# Altium PCB USB HUB 2.0.PcbDoc
Units mil, origin at the board's own origin, x right, y up, seen from the top; angles counter-clockwise.
Board outline 2250 x 2500 mil, 2 copper layers (Top Layer, Bottom Layer); 52 components, 33 nets, 185 pads, 235 vias.
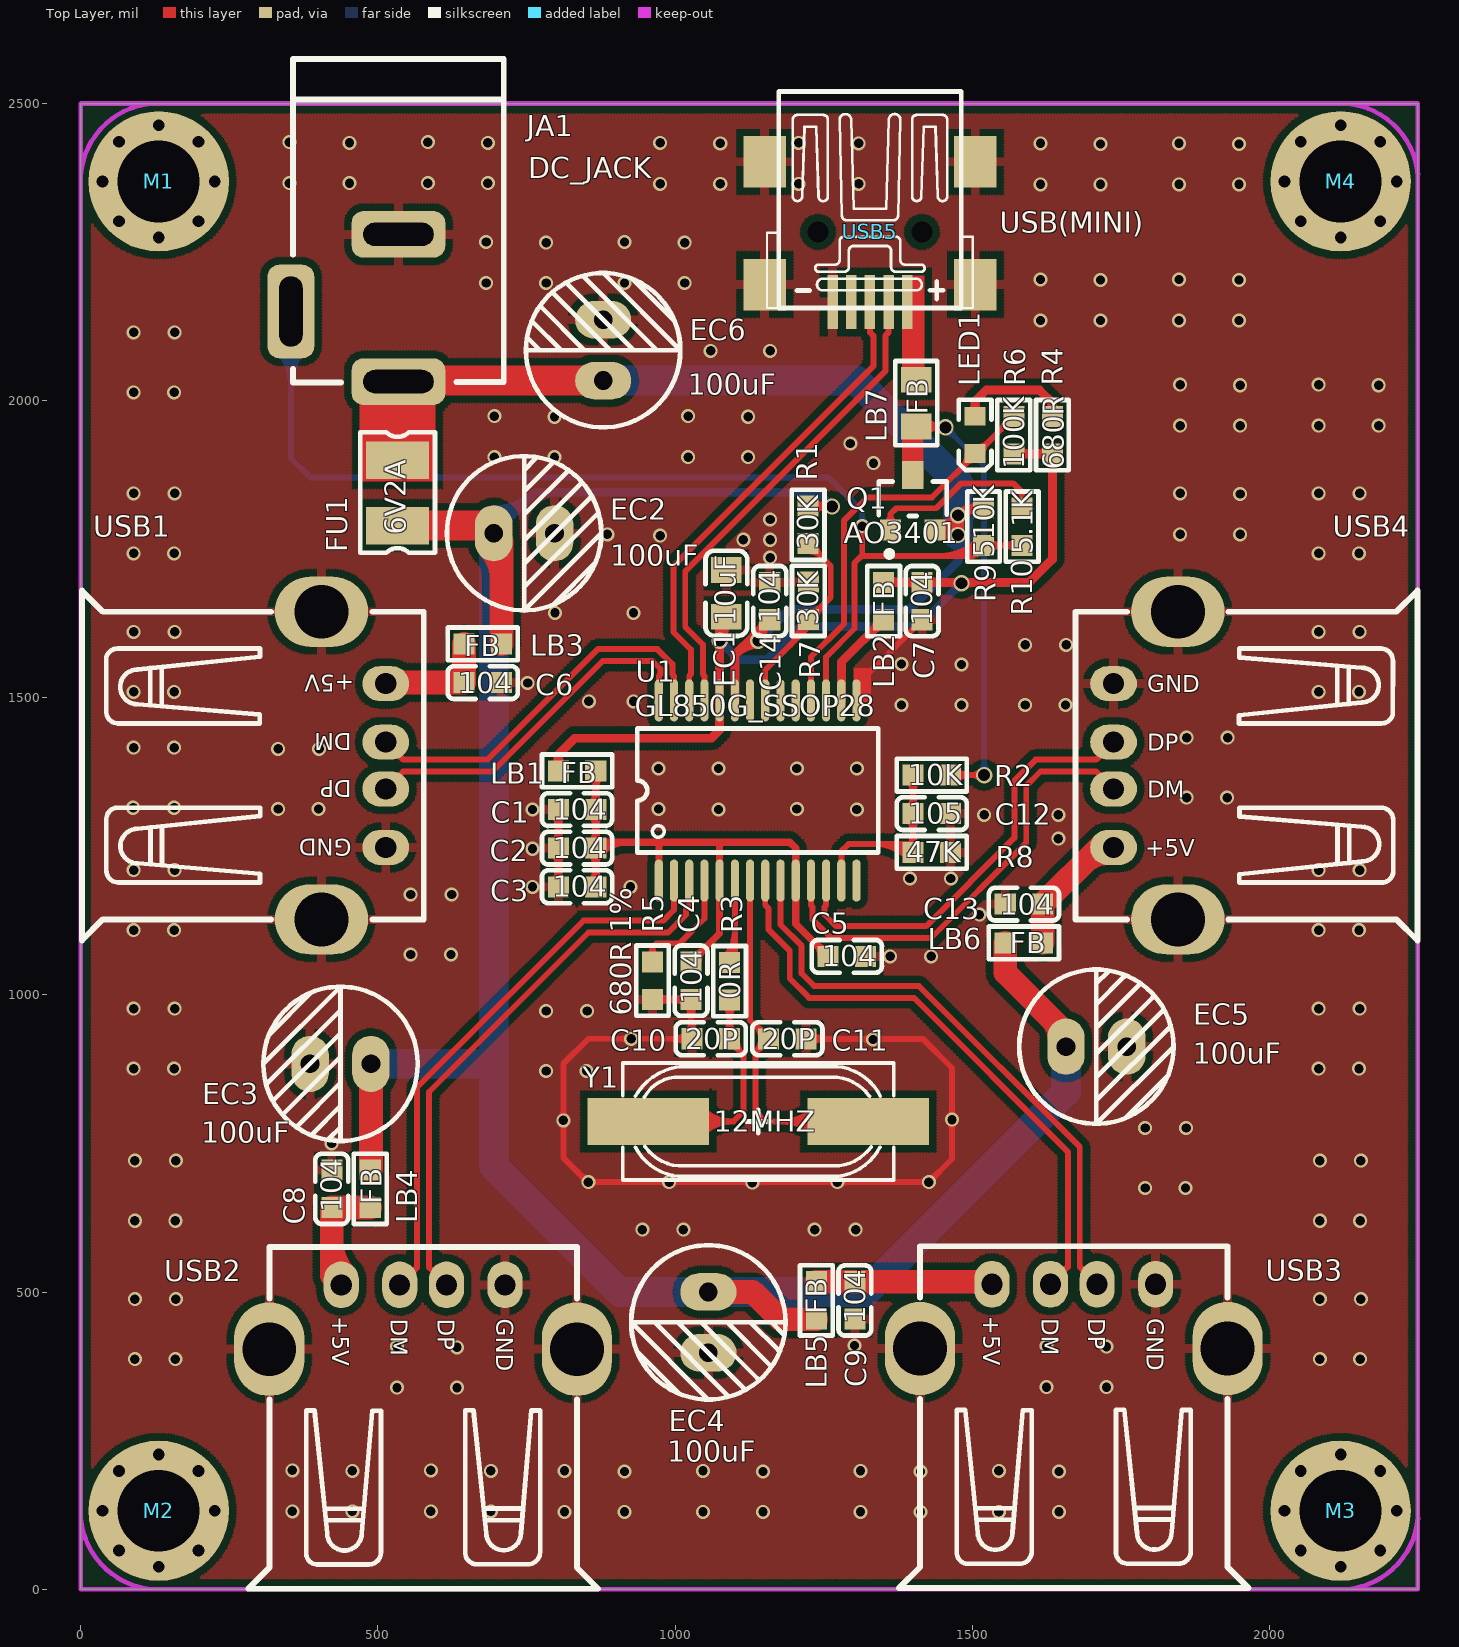
[diagram p0: Top Layer view]
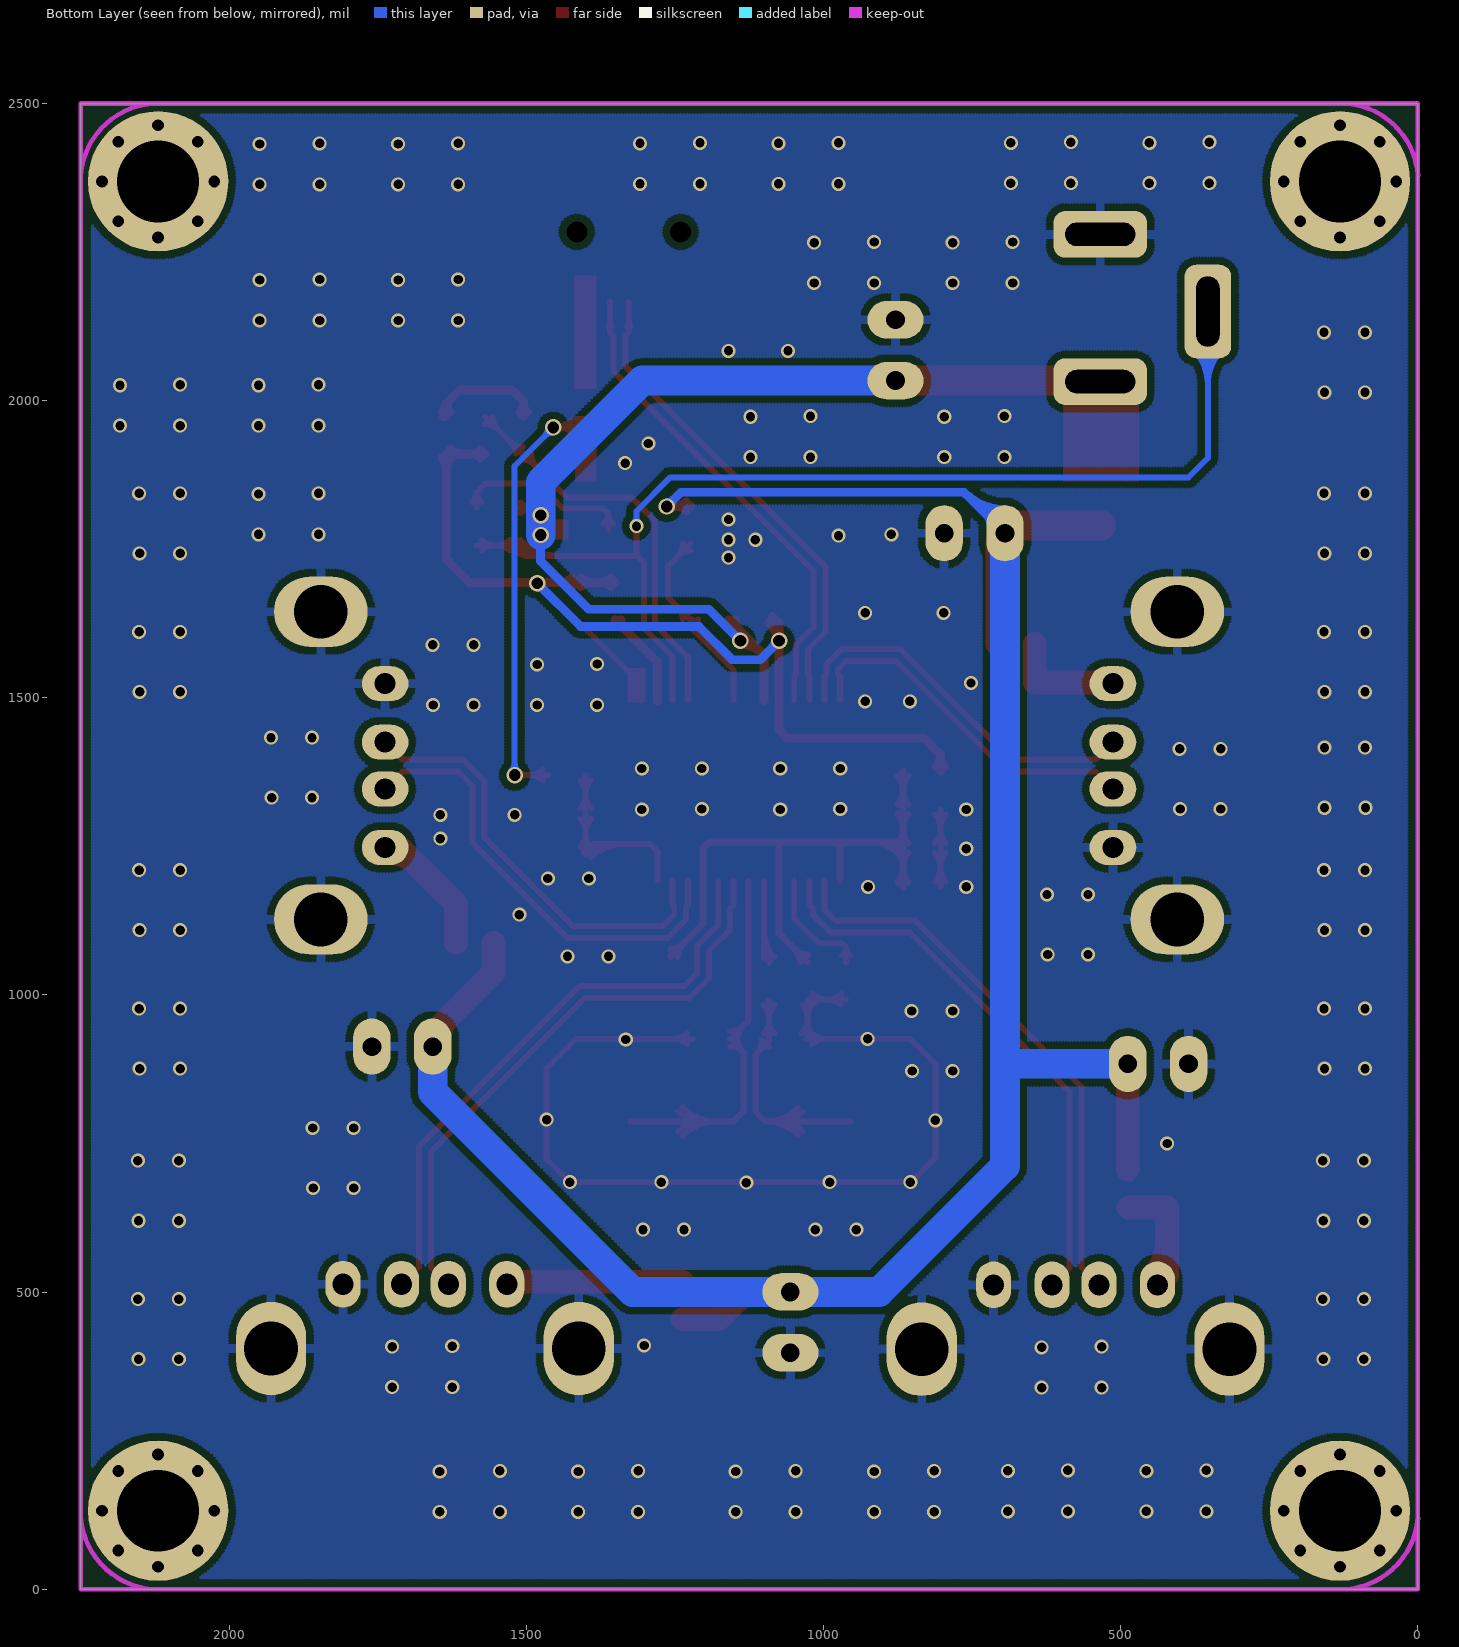
[diagram p1: Bottom Layer view, seen from below]
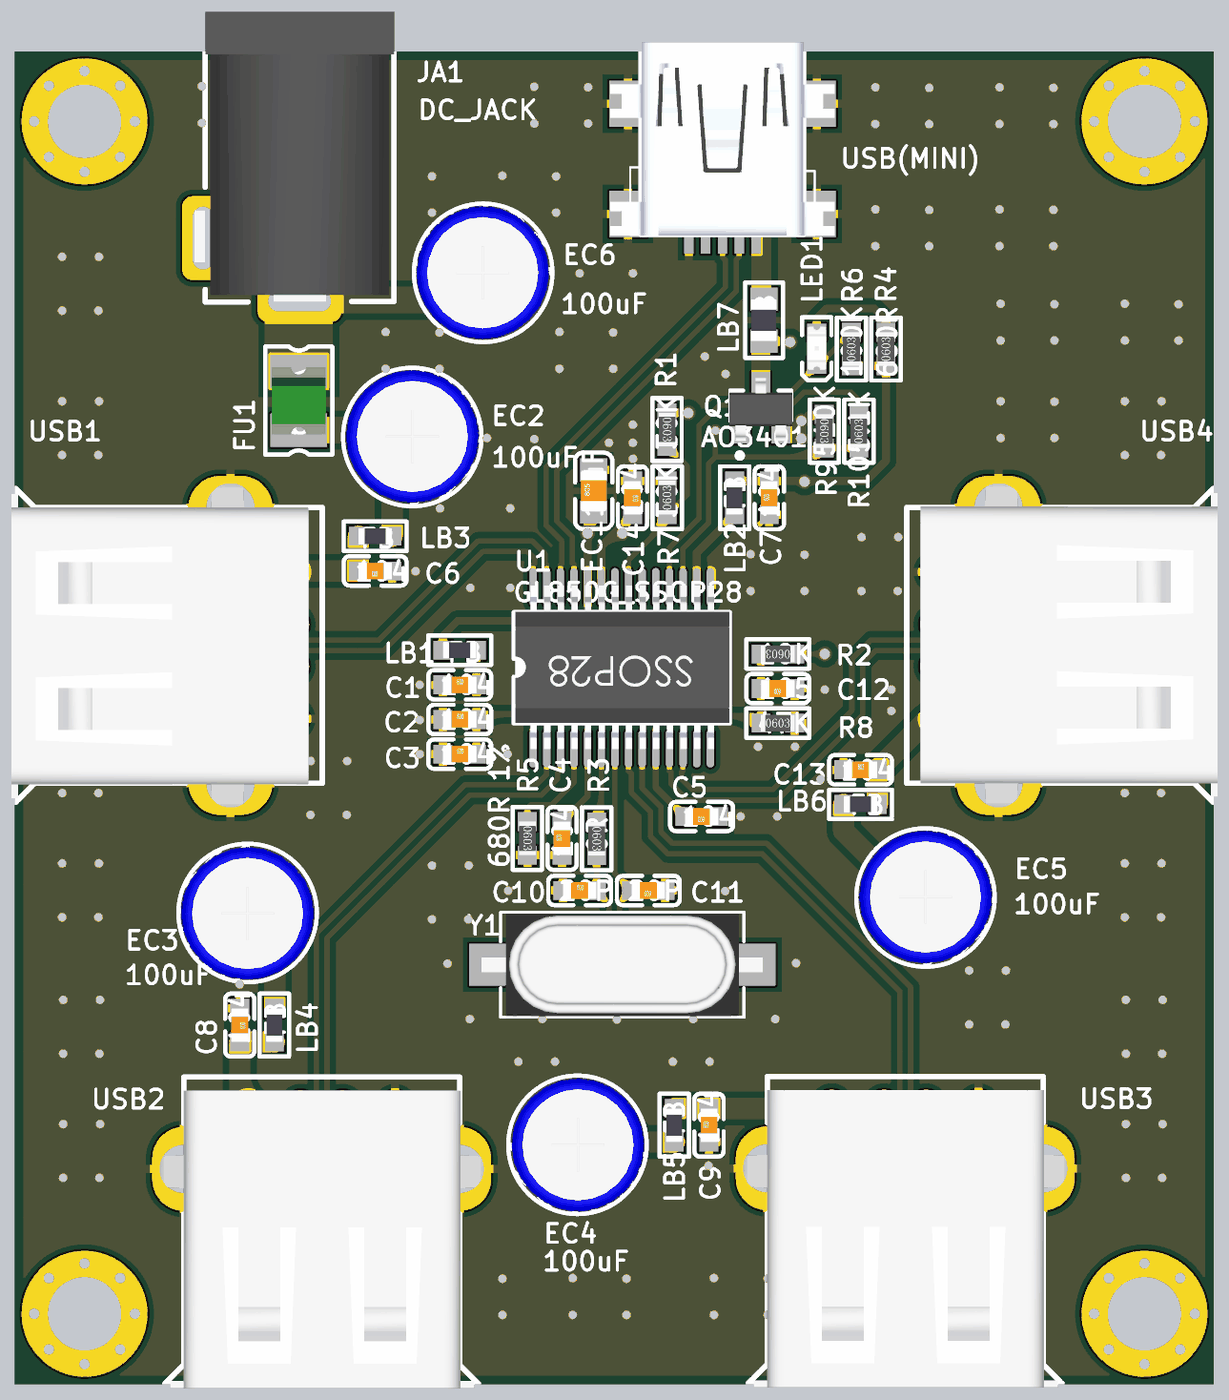
[diagram p2: 3D render of the assembled board from above, using the file's embedded part models]

## Layer stack, top to bottom
Top Layer: signal copper 1.4
Dielectric: dielectric 12.6, FR-4, Dk 4.8
Bottom Layer: signal copper 1.4

## Board outline
0,0 0,2500 2250,2500 2250,0

## Design rules (kind name [scope] priority, off if disabled: settings)
Clearance Polygon [InPolygon] p1: gap=12
Clearance [All] p2: gap=8
ComponentClearance [All] p1 off: gap=1 collisioncheckmode=3 verticalgap=1 showdistances=FALSE
DiffPairsRouting DiffPair_DiffPairsRouting [InDifferentialPairClass('DM_DP Class')] p1: maxlimit=10 minlimit=8 mostfreqgap=10 maxuncoupledlength=500
DiffPairsRouting [All] p2: maxlimit=10 minlimit=10 mostfreqgap=10 maxuncoupledlength=500
HoleSize [All] p1: absolutevalues=TRUE maxlimit=300 minlimit=1 maxpercent=80.000 minpercent=20.000
HoleToHoleClearance [All] p1: gap=1 allowstackedmicrovias=TRUE
MatchedLengths DiffPair_MatchedLengths [InComponentClass('DM_DP Class')] p1: tolerance=1000 checknetsindiffpair=TRUE checkdiffpairvsdiffpair=TRUE checkothers=TRUE
MinimumSolderMaskSliver [All] p1 off: minsoldermaskwidth=1
PolygonConnect GND_VIA [IsVia] p1: connectstyle=Direct reliefconductorwidth=10 reliefentries=4 polygonreliefangle="90 Angle"
PolygonConnect [All] p2: connectstyle=Relief reliefconductorwidth=15 reliefentries=4 polygonreliefangle="90 Angle"
RoutingVias [All] p1: holewidth=28 width=50 viastyle="Through Hole" minholewidth=5 minwidth=5 maxholewidth=100 maxwidth=100
ShortCircuit M_KONG_1 [InComponent(M1) OR  InComponent(M2) OR  InComponent(M3) OR InComponent(M4)] p1: allowed=TRUE
ShortCircuit [All] p2: allowed=FALSE
SilkToSilkClearance [All] p1 off: silktosilkclearance=0
SilkscreenOverComponentPads [All] p1 off: minsilkscreentomaskgap=0
SolderMaskExpansion [All] p1: expansion=4
Width DiffPair_Width [All] p1: maxlimit=50 minlimit=5 preferedwidth=10 minimp=50.000000 maximp=50.000000 favimp=50.000000
Width [All] p2: maxlimit=50 minlimit=5 preferedwidth=10 minimp=50.000000 maximp=50.000000 favimp=50.000000
20 further rules are at their usual default settings.

## Classes and differential pairs
differential pair D_D4: +DM4 -DP4
differential pair D_D3: +DM3 -DP3
differential pair D_D2: +DM2 -DP2
differential pair D_D1: +DM1 -DP1
differential pair D_D0: +DM0 -DP0

## Components (designator, comment, footprint, x,y, rotation, side; value= is the part's Value field where it differs from the comment)
C1 "104" C0603 835,1312 r0 top
C2 "104" C0603 835,1247 r0 top
C3 "104" C0603 835,1182 r0 top
C4 "104" C0603 1027,1024 r90 top
C5 "104" C0603 1289,1065 r180 top
C6 "104" C0603 676.4,1525.7 r180 top
C7 "104" C0603 1415.9,1662.9 r90 top
C8 "104" C0603 422.3,673.6 r270 top
C9 "104" C0603 1302.7,485.8 r90 top
C10 "20P" C0603 1060.1,926.3 r0 top
C11 "20P" C0603 1188.9,926.2 r180 top
C12 "105" C0603 1432,1305 r180 top
C13 "104" C0603 1587.1,1152.7 r0 top
C14 "104" C0603 1159.3,1662.9 r270 top
EC1 "10uF" C0805 1086.3,1675.9 r90 top
EC2 "100uF" RB-.2.5/.6.3MM 746,1777 r0 top
EC3 "100uF" RB-.2.5/.6.3MM 437,884 r180 top
EC4 "100uF" RB-.2.5/.6.3MM 1056,449 r270 top
EC5 "100uF" RB-.2.5/.6.3MM 1709,913 r0 top
EC6 "100uF" RB-.2.5/.6.3MM 879,2085 r90 top
FU1 "6V2A" FU1210 533,1845 r90 top
JA1 "DC_JACK" DC-005 444,2156 r180 top
LB1 "FB" FB0603 835,1377 r0 top
LB2 "FB" FB0603 1350.9,1662.9 r90 top
LB3 "FB" FB0603 676.36,1590.74 r180 top
LB4 "FB" FB0603 487,673.56 r270 top
LB5 "FB" FB0603 1237.66,485.8 r90 top
LB6 "FB" FB0603 1587.1,1087.66 r0 top
LB7 "FB" FB0805 1406,1996 r90 top
LED1 "PWR_LED" LED-0603 1505,1974 r270 top
M1 "M_KONG" M3*8 131,2369 r0 top
M2 "M_KONG" M3*8 131,132 r0 top
M3 "M_KONG" M3*8 2120,132 r0 top
M4 "M_KONG" M3*8 2120,2369 r0 top
Q1 "AO3401" SOT23 1399.9,1828.7 r0 top
R1 "30K" R0603 1224,1791 r270 top
R2 "10K" R0603 1431.96,1370 r180 top
R3 "0R" R0603 1091.9,1023.2 r270 top
R4 "680R" R0603 1635,1942 r90 top
R5 "680R 1%" R0603 962,1024 r270 top
R6 "100K" R0603 1570,1942 r90 top
R7 "30K" R0603 1224.34,1663.12 r90 top
R8 "47K" R0603 1432,1240 r0 top
R9 "510K" R0603 1519,1788 r270 top
R10 "5.1K" R0603 1584,1788 r90 top
U1 "GL850G_SSOP28" SSOP28 1139,1344 r90 top
USB1 "USB_A(B)" USB-A 459,1386 r180 top
USB2 "USB_A(B)" USB-A 576,458 r270 top
USB3 "USB_A(B)" USB-A 1671,459 r270 top
USB4 "USB_A(B)" USB-A 1792,1386 r0 top
USB5 "USB(MINI)" USB-MINI-SMT 1328,2284 r180 top
Y1 "12MHZ" HC-49S_SMD 1140,787 r0 top

## Footprints (in the part's own frame and the unit in brackets; to place one, negate y for a bottom-side part, rotate by r counter-clockwise, add the part's x,y. Pads: shape width x height; smd on the part's side, far side on the other; paste and mask are expansions set on the pad)
C0603 [mm]
  rect 0.9x0.9 smd: 1(-0.8,0) 2(0.8,0)
  silkscreen extent -1.5,-0.7 1.5,0.7, body extent -0.8,-0.4 0.8,0.4, height 0.3
C0805 [mm]
  rect 1.1x1.3 smd: 1(-1,0) 2(1,0)
  silkscreen extent -1.83,-0.89 1.83,0.89, body extent -1,-0.63 1,0.63, height 0.77
DC-005 [mm]
  rrect50% 4x2 hole 1 slot 3 at 0 deg: 1(-2.3,3.15) 2(-2.3,-3.15)
  rrect50% 2x4 hole 1 slot 3 at 90 deg: 3(2.3,0.15)
  silkscreen extent -6.8,-10.65 2.2,3.19, body extent -6.8,-10.63 2.7,3.19, height 11.02
FB0603 [mm]
  rect 0.9x0.9 smd: 1(-0.8,0) 2(0.8,0)
  silkscreen extent -1.5,-0.7 1.5,0.7, body extent -0.8,-0.39 0.8,0.41, height 0.8
FB0805 [mm]
  rect 1.1x1.3 smd: 1(-1,0) 2(1,0)
  silkscreen extent -1.8,-0.9 1.8,0.9, body extent -1,-0.62 1,0.64, height 0.85
FU1210 [mm]
  rect 1.6x2.7 smd: 1(-1.4,0) 2(1.4,0)
  silkscreen extent -2.57,-1.6 2.59,1.6, body extent -1.61,-1.28 1.61,1.3, height 0.67
HC-49S_SMD [mm]
  rect 5.2x2 smd: 1(-4.7,0) 2(4.7,0)
  silkscreen extent -5.8,-2.5 5.8,2.5, body extent -6.7,-2.46 6.7,2.44, height 4
LED-0603 [mm]
  rect 0.8x0.9 smd: 1(0,0) 2(1.6,0)
  silkscreen extent -0.7,-0.7 2.3,0.7, body extent -0.26,-0.45 1.81,0.46, height 0.85
M3*8 [mm] "M3螺丝孔"
  round 0.5 hole 0.5: 1(-2.4,0) 1(-1.7,-1.7) 1(-1.7,1.7) 1(0,-2.4) 1(0,2.4) 1(1.7,-1.7) 1(1.7,1.7) 1(2.4,0)
  round 6 hole 3.5: 1(0,0)
R0603 [mm]
  rect 0.9x0.9 smd: 1(-0.8,0) 2(0.8,0)
  silkscreen extent -1.5,-0.7 1.5,0.7, body extent -0.8,-0.4 0.8,0.4, height 0.45
RB-.2.5/.6.3MM [mm] "电解电容"
  oval 1.6x2.4 hole 0.8: 1(-1.3,0) 2(1.3,0)
  silkscreen extent -3.3,-3.3 3.3,3.3, body extent -3.18,-3.15 3.18,3.2, height 11.53
SOT23 [mm]
  rect 0.91x0.91 smd: 1(-0.95,-1.175) 2(0.95,-1.175)
  rect 0.91x1.2 smd: 3(0,1.175)
  silkscreen extent -1.45,-2.32 1.45,0.9, body extent -1.5,-1.5 1.5,1.5, height 1
SSOP28 [mm]
  oval 1.8x0.35 smd: 1(-3.85,4.225) 2(-3.85,3.575) 3(-3.85,2.925) 4(-3.85,2.275) 5(-3.85,1.625) 6(-3.85,0.975) 7(-3.85,0.325) 8(-3.85,-0.325) 9(-3.85,-0.975) 10(-3.85,-1.625) 11(-3.85,-2.275) 12(-3.85,-2.925) 13(-3.85,-3.575) 14(-3.85,-4.225) 15(3.85,-4.225) 16(3.85,-3.575) 17(3.85,-2.925) 18(3.85,-2.275) 19(3.85,-1.625) 20(3.85,-0.975) 21(3.85,-0.325) 22(3.85,0.325) 23(3.85,0.975) 24(3.85,1.625) 25(3.85,2.275) 26(3.85,2.925) 27(3.85,3.575) 28(3.85,4.225)
  silkscreen extent -2.65,-5.15 2.65,5.15, body extent -3.88,-5.12 3.92,5.08, height 1.75
USB-A [mm]
  oval 2x1.5 hole 0.9: 1(-1.375,-3.5) 2(-1.375,-1) 3(-1.375,1) 4(-1.375,3.5)
  oval 4x3 hole 2.3: 5(1.375,-6.575) 6(1.375,6.575)
  silkscreen extent -3,-7.48 11.62,7.48, body extent -2.35,-7.87 11.81,7.92, height 7.55
USB-MINI-SMT [mm]
  rect 0.45x2.3 smd: 1(-1.6,3) 2(-0.8,3) 3(0,3) 4(0.8,3) 5(1.6,3)
  rect 1.8x2.2 smd: 6(-4.5,2.25) 6(-4.5,-3) 6(4.5,2.25) 6(4.5,-3)
  round 0.8 hole 0.9 unplated: MH1(-2.22,0) MH2(2.22,0)
  silkscreen extent -4.4,-6 4.4,3.25, body extent -5.35,-5.92 5.35,3.28, height 3.95

## Part data
C1 C2 C3 C4 C5 C6 C7 C8 C9 C10 C11 C12 C13 C14: library part CAP, "Capacitor"
EC1 EC2 EC3 EC4 EC5 EC6: library part ELECTRO, "Electrolytic Capacitor"
FU1: library part FUSE, "保险丝"
JA1: "5V/9V电源座"
LB1 LB2 LB3 LB4 LB5 LB6 LB7: "磁珠"
LED1: library part LED, "发光二极管"
Q1: library part MOSFET-P, "P-Channel MOSFET"
R1 R2 R3 R4 R5 R6 R7 R8 R9 R10: library part RES, "电阻"
U1: "USB2.0 HUB控制芯片"
USB1 USB2 USB3 USB4: "USB母座接口"
USB5: "USB-MINI"
Y1: library part CRYSTAL, "晶振"

## Via types
v1: diameter 23.62, hole 15.75, Top Layer to Bottom Layer, 227 vias
v2: diameter 27.56, hole 19.68, Top Layer to Bottom Layer, 8 vias

## Nets (pads, with @x,y where several pads share a name; then routed paths per layer and width w, separated by ;. In a path a pad name is that pad's centre, name@x,y a point inside that pad or via, vN(x,y) a via of type N, cw(c..) or ccw(c..) an arc to the next point about the centre after c; other vN are vias at no path point)
AVDD: C1.2 C2.2 C3.2 C4.2 C5.2 LB1.2 U1.1 U1.5 U1.10 | length 1461.2
  Top Layer w12: C3.2@858.21,1190.28 ccw(c838.21,1210.29) 866.5,1210.29 ccw(c894.78,1210.29) C3.2@874.78,1190.28 ; C2.2@858.21,1238.72 cw(c838.21,1218.71) 866.5,1218.71 cw(c894.78,1218.71) 874.78,1238.72 cw(c918.92,1194.57) 918.92,1257 ; C2.2@858.21,1255.28 ccw(c838.21,1275.29) 866.5,1275.29 ccw(c894.78,1275.29) C2.2@874.78,1255.28 ; C1.2@858.21,1303.72 cw(c838.21,1283.71) 866.5,1283.71 cw(c894.78,1283.71) C1.2@874.78,1303.72 ; C1.2@858.21,1320.28 ccw(c838.21,1340.29) 866.5,1340.29 ccw(c894.78,1340.29) C1.2@874.78,1320.28 ; LB1.2@858.21,1368.72 cw(c838.21,1348.71) 866.5,1348.71 cw(c894.78,1348.71) LB1.2@874.78,1368.72 ; C2.2@866.3,1247.2 cw(c889.95,1223.54) 889.95,1257 ; C3.2 C2.2 ; LB1.2 C1.2 C2.2 ; U1.1 972.66,1256.66 973,1257 ; C4.2 1075.02,1103.52 U1.5 1075.02,1257 ; C4.2@1027,1067.21 ccw(c1027,1095.5) 1047,1075.5 ccw(c1067,1055.5) C4.2@1038.72,1055.5 ; C5.2@1245.79,1065 ccw(c1217.5,1065) 1237.5,1085 ccw(c1257.5,1105) C5.2@1257.5,1076.72 ; C5.2 1202.98,1119.53 U1.10 1202.98,1247.02 1193,1257 1075.02,1257 ; C2.2 876.5,1257 973,1257 ; 973,1257 1075.02,1257
DM0: U1.25 USB5.2 | length 852.1
  Top Layer w10: U1.25 1049.43,1537 1046.64,1539.8 1046.64,1589.65 1017.14,1619.14 1017.14,1713.14 1353.75,2049.75 1353.75,2071 ; 1353.75,2059 1353.75,2071 ; USB5.2@1356.77,2126.74 cw(c1350.18,2120.16) 1359.5,2120.16 cw(c1368.81,2120.16) USB5.2@1362.22,2126.74 ; USB5.2 1359.5,2115 1353.75,2109.25 1353.75,2071
DM1: U1.27 USB1.2 | length 644.4
  Top Layer w10: USB1.2 542.5,1396 684,1396 870,1582 970.28,1582 995.46,1556.83 995.46,1539.8 998.25,1537 U1.27
DM2: U1.2 USB2.2 | length 950
  Top Layer w10: USB2.2 566,541.5 566,845 846,1125 980,1125 998.25,1143.25 U1.2
DM3: U1.8 USB3.2 | length 1005.6
  Top Layer w10: U1.8 1151.8,1151 1157.39,1145.41 1157.39,1109.96 1193,1074.35 1193,1027.72 1225.72,995 1402,995 1661,736 1661,542.5 USB3.2
DM4: U1.11 USB4.2 | length 770.5
  Top Layer w10: U1.11 1228.57,1151 1231.36,1148.2 1231.36,1127.07 1262.72,1095.72 1430.72,1095.72 1591,1256 1591,1352 1615,1376 1708.5,1376 USB4.2
DP0: U1.26 USB5.3 | length 840.1
  Top Layer w10: U1.26 1023.84,1537 1026.64,1539.8 1026.64,1581.36 997.14,1610.86 997.14,1721.43 1333.75,2058.03 1333.75,2109.25 1328,2115 USB5.3 ; USB5.3@1325.27,2126.74 cw(c1318.69,2120.16) 1328,2120.16 cw(c1337.31,2120.16) USB5.3@1330.73,2126.74
DP1: U1.28 USB1.3 | length 611.2
  Top Layer w10: USB1.3 542.5,1376 692.28,1376 878.28,1562 962,1562 975.46,1548.54 975.46,1539.8 972.66,1537 U1.28
DP2: U1.3 USB2.3 | length 952.3
  Top Layer w10: USB2.3 586,541.5 586,836.72 854.28,1105 988.28,1105 1018.25,1134.97 1018.25,1145.41 1023.84,1151 U1.3
DP3: U1.9 USB3.3 | length 1003.3
  Top Layer w10: U1.9 1177.39,1118.25 1213,1082.63 1213,1036 1234,1015 1410.28,1015 1681,744.28 1681,542.5 USB3.3
DP4: U1.12 USB4.3 | length 737.4
  Top Layer w10: U1.12 1254.16,1151 1251.36,1148.2 1251.36,1135.35 1271,1115.72 1422.43,1115.72 1571,1264.28 1571,1360.28 1606.72,1396 1708.5,1396 USB4.3
DVDD: C7.2 EC1.1 LB1.1 LB2.2 R4.1 R6.1 U1.24 | length 1972
  Top Layer w15: LB1.1@796.28,1384.22 ccw(c778.84,1401.66) 803.5,1401.66 ccw(c828.17,1401.66) LB1.1@810.73,1384.22 ; LB1.1 803.5,1404.5 831,1432 1061,1432 1075.02,1446.02 U1.24 v2(1075,1596) 1075.02,1625.25 EC1.1 ; v2@1070.56,1591.56 cw(c1059.78,1580.78) 1075.02,1580.78 ; v2@1070.56,1600.44 ccw(c1059.78,1611.22) 1075.02,1611.22 ; 1075.02,1580.9 cw(c1090.1,1580.9) v2@1079.44,1591.56 ; v2@1075.02,1584.64 cw(c1134.25,1584.64) EC1.1@1092.37,1626.52 ; 1075.02,1611.1 ccw(c1090.1,1611.1) v2@1079.44,1600.44 ; LB2.2 C7.2 1482,1694.4 1596.4,1694.4 1635,1733 R4.1 R6.1 ; LB2.2@1358.12,1687.17 cw(c1375.56,1669.73) 1375.56,1694.4 cw(c1375.56,1719.06) LB2.2@1358.12,1701.62 ; C7.2@1408.68,1687.17 ccw(c1391.24,1669.73) 1391.24,1694.4 ccw(c1391.24,1719.06) C7.2@1408.68,1701.62 ; C7.2@1423.12,1687.17 cw(c1440.56,1669.73) 1440.56,1694.4 cw(c1440.56,1719.06) C7.2@1423.12,1701.62 ; 1463.47,1694.4 cw(c1463.47,1674.47) v2@1477.56,1688.56 ; v2@1486.44,1688.56 cw(c1500.53,1674.47) 1500.53,1694.4 ; R6.1@1577.22,1903.28 cw(c1594.66,1885.84) 1594.66,1910.5 cw(c1594.66,1935.17) R6.1@1577.22,1917.73 ; R4.1@1627.78,1917.73 cw(c1610.34,1935.17) 1610.34,1910.5 cw(c1610.34,1885.84) 1627.78,1903.28 cw(c1610.34,1885.84) 1635,1885.84 cw(c1659.66,1885.84) R4.1@1642.22,1903.28
  Bottom Layer w15: v2@1075,1589.72 cw(c1075,1574.56) 1085.72,1585.28 cw(c1096.44,1596) v2@1081.28,1596 ; v2(1075,1596) 1107,1564 1154,1564 1210,1620 1409,1620 v2(1482,1693) ; v2@1475.72,1693 cw(c1460.56,1693) 1471.28,1682.28 cw(c1482,1671.56) v2@1482,1686.72
GND: C1.1 C2.1 C3.1 C4.1 C5.1 C6.1 C7.1 C8.1 C9.1 C10.1 C11.1 C12.1 C13.1 C14.1 EC1.2 EC2.2 EC3.2 EC4.2 EC5.2 EC6.2 JA1.2 R5.2 R7.2 R8.2 U1.15 USB1.4 USB1.5 USB1.6 USB2.4 USB2.5 USB2.6 USB3.4 USB3.5 USB3.6 USB4.4 USB4.5 USB4.6 USB5.5 USB5.6 | length 2888.9
  Top Layer w10: C3.1@794.51,1190.99 ccw(c772.8,1212.7) 803.5,1212.7 ccw(c834.2,1212.7) C3.1@812.5,1190.99 ; C2.1@794.51,1238.01 cw(c772.8,1216.3) 803.5,1216.3 cw(c834.2,1216.3) C2.1@812.5,1238.01 ; C2.1@794.51,1255.99 ccw(c772.8,1277.7) 803.5,1277.7 ccw(c834.2,1277.7) C2.1@812.5,1255.99 ; C1.1@794.51,1303.01 cw(c772.8,1281.3) 803.5,1281.3 cw(c834.2,1281.3) C1.1@812.5,1303.01 ; C3.1 C2.1 C1.1 ; v1@807.18,784.18 cw(c795.56,772.56) 812,772.56 cw(c828.44,772.56) v1@816.82,784.18 ; v1@807.18,793.82 ccw(c795.56,805.44) 812,805.44 ccw(c828.44,805.44) v1@816.82,793.82 ; 840.67,697.33 ccw(c854,710.67) v1@854,691.81 ; 843.08,694.92 cw(c833.16,685) v1@847.19,685 ; v1@858.82,680.18 cw(c870.44,668.56) 870.44,685 cw(c870.44,701.44) v1@858.82,689.82 ; 908.83,926.3 cw(c908.83,908.83) v1@921.18,921.18 ; 910.28,926.3 ccw(c910.28,941.72) v1@921.18,930.82 ; v1@930.82,921.18 cw(c943.17,908.83) 943.17,926.3 ; v1@930.82,930.82 ccw(c941.72,941.72) 941.72,926.3 ; R5.2 C4.1 1027,927.9 C10.1 926,926.3 854.3,926.3 812,884 v1(812,789) 812,726 853,685 v1(854,685) v1(990,685) 1130,685 v1(1273,685) v1(1427,685) 1466,724 v1(1466,790) 1466,877 1416.8,926.2 1333,926.2 C11.1 ; R5.2@970.99,983.51 cw(c992.7,961.8) 992.7,992.5 cw(c992.7,1023.2) R5.2@970.99,1001.5 ; v1@985.18,680.18 ccw(c973.56,668.56) 973.56,685 ccw(c973.56,701.44) v1@985.18,689.82 ; v1@994.82,680.18 cw(c1006.44,668.56) 1006.44,685 cw(c1006.44,701.44) v1@994.82,689.82 ; C4.1@1018.01,1001.5 cw(c996.3,1023.2) 996.3,992.5 cw(c996.3,961.8) 1018.01,983.51 cw(c996.3,961.8) 1027,961.8 cw(c1057.7,961.8) C4.1@1035.99,983.51 ; C10.1@1019.61,917.31 ccw(c997.9,895.6) 997.9,926.3 ccw(c997.9,957) 1019.61,935.29 ccw(c1001.78,953.13) 1027,953.13 ; 1027,960.87 ccw(c1063.18,960.87) C10.1@1037.6,935.29 ; 1111.14,685 cw(c1111.14,665.14) v1@1125.18,679.18 ; 1115.97,685 ccw(c1115.97,698.03) v1@1125.18,688.82 ; v1@1134.82,679.18 cw(c1148.86,665.14) 1148.86,685 ; v1@1134.82,688.82 ccw(c1144.03,698.03) 1144.03,685 ; C11.1@1229.39,917.21 cw(c1251.1,895.5) 1251.1,926.2 cw(c1251.1,956.9) C11.1@1229.39,935.19 ; v1@1268.18,680.18 ccw(c1256.56,668.56) 1256.56,685 ccw(c1256.56,701.44) v1@1268.18,689.82 ; v1@1277.82,680.18 cw(c1289.44,668.56) 1289.44,685 cw(c1289.44,701.44) v1@1277.82,689.82 ; U1.15 1305.34,1520.84 C7.1 ; 1313.66,926.2 cw(c1313.66,905.66) v1@1328.18,920.18 ; 1319.45,926.2 ccw(c1319.45,938.55) v1@1328.18,929.82 ; v1@1337.82,920.18 cw(c1352.34,905.66) 1352.34,926.2 ; v1@1337.82,929.82 ccw(c1346.55,938.55) 1346.55,926.2 ; v1@1422.18,680.18 ccw(c1410.56,668.56) 1410.56,685 ccw(c1410.56,701.44) v1@1422.18,689.82 ; v1@1427,691.81 ccw(c1427,708.25) 1438.63,696.63 ccw(c1450.25,685) v1@1433.81,685 ; v1@1461.18,785.18 cw(c1449.56,773.56) 1466,773.56 cw(c1482.44,773.56) v1@1470.82,785.18 ; v1@1461.18,794.82 ccw(c1449.56,806.44) 1466,806.44 ccw(c1482.44,806.44) v1@1470.82,794.82
  other v1: 814,130 915,130 1047,130 1148,130 1312,130 1413,130 1545,130 1646,130 356,131 457,131 589,131 690,131 915,198 1148,198 1413,198 1646,198 457,199 690,199 814,199 1047,199 1312,199 1545,199 356,200 589,200 532,339 633,339 1625,340 1726,340 91,387 159,387 2085,387 2153,387 633,407 532,408 1726,408 1625,409 1302,410 91,488 160,488 2085,488 2154,488 945,605 1014,605 1235,605 1304,605 91,620 159,620 2085,620 2153,620 1791,675 1859,675 1130,684 91,721 160,721 2085,721 2154,721 422,750 1791,776 1860,776 783,872 851,872 89,876 157,876 2083,876 2151,876 1333,925 926,926 783,973 852,973 89,977 158,977 2083,977 2152,977 1362,1065 1431,1065 555,1068 623,1068 89,1109 157,1109 2083,1109 2151,1109 1512,1135 555,1169 624,1169 760,1182 925,1182 1395,1196 1464,1196 89,1210 158,1210 2083,1210 2152,1210 760,1246 1645,1263 1520,1303 1645,1303 760,1312 1073,1312 1306,1312 332,1313 400,1313 972,1313 1205,1313 88,1315 157,1315 1861,1332 1929,1332 972,1381 1073,1381 1205,1381 1306,1381 332,1414 401,1414 89,1416 157,1416 1861,1433 1930,1433 1381,1488 1482,1488 1589,1488 1657,1488 855,1494 930,1494 89,1510 157,1510 2083,1510 2151,1510 752,1525 1482,1556 1381,1557 1589,1589 1658,1589 89,1611 158,1611 2083,1611 2152,1611 798,1643 930,1643 1160,1736 89,1743 157,1743 2083,1743 2151,1743 1115,1766 1160,1766 975,1773 886,1775 1850,1775 1951,1775 1160,1800 1951,1843 89,1844 158,1844 1850,1844 2083,1844 2152,1844 1334,1895 696,1905 797,1905 1022,1905 1123,1905 1295,1928 1850,1958 1951,1958 2083,1958 2184,1958 797,1973 1123,1973 696,1974 1022,1974 89,2014 157,2014 1951,2026 2184,2026 1850,2027 2083,2027 1060,2084 1160,2084 89,2115 158,2115 1615,2135 1716,2135 1848,2135 1949,2135 682,2198 783,2198 915,2198 1016,2198 1716,2203 1949,2203 1615,2204 1848,2204 783,2266 1016,2266 682,2267 915,2267 1615,2364 1716,2364 1848,2364 1949,2364 975,2365 1076,2365 1208,2365 1309,2365 351,2366 452,2366 584,2366 685,2366 1716,2432 1949,2432 1076,2433 1309,2433 1615,2433 1848,2433 452,2434 685,2434 975,2434 1208,2434 351,2435 584,2435
NetC6_2: C6.2 LB3.2 USB1.1 | length 197.6
  Top Layer w40: USB1.1 515.04,1525.7 C6.2 C6.2 LB3.2
NetC8_2: C8.2 LB4.2 USB2.1 | length 262
  Top Layer w40: 422.3,583.38 ccw(c499.6,583.38) USB2.1@444.94,528.71 ; USB2.1 422.3,528.04 C8.2 LB4.2 LB4.2
NetC9_2: C9.2 LB5.2 USB3.1 | length 326.5
  Top Layer w40: LB5.2 C9.2 1529.04,517.3 USB3.1 ; 1500.16,517.3 cw(c1500.16,480.08) USB3.1@1526.47,506.4
NetC10_2: C10.2 R3.2 Y1.1 | length 715.2
  Top Layer w10: Y1.1 1098,787 ; Y1.1@1035.62,770.22 cw(c1074.71,733.1) 1074.71,787 cw(c1074.71,840.9) Y1.1@1035.62,803.78 ; Y1.1@1042.87,763.33 cw(c1098,710.98) 1098,787 ; Y1.1@1042.87,810.67 ccw(c1098,863.02) 1098,787 ; C10.2@1082.6,935.29 ccw(c1060.16,957.73) 1091.9,957.73 ; R3.2@1082.91,982.71 cw(c1061.2,961) 1091.9,961 cw(c1122.6,961) R3.2@1100.89,982.71 ; C10.2@1091.6,913.58 cw(c1091.6,892.29) 1106.65,907.35 ; 1091.9,956.27 ccw(c1121.56,956.27) C10.2@1100.59,935.29 ; R3.2 1091.9,926.6 C10.2 1091.6,922.4 1115,899 1115,804 1098,787 ; C10.2@1104.26,925.17 ccw(c1134.56,922.46) 1113.05,900.95
NetC13_2: C13.2 LB6.2 USB4.1 | length 268.3
  Top Layer w40: LB6.2 C13.2 1714.1,1248.2 USB4.1 ; 1687.99,1222.1 cw(c1728.02,1182.06) USB4.1@1728.02,1238.68
NetLB2_1: LB2.1 U1.16 | length 204
  Top Layer w15: U1.16 1279.75,1560.25 LB2.1 ; LB2.1@1340.68,1631.4 cw(c1316.02,1631.4) 1333.46,1613.96 cw(c1350.9,1596.52) LB2.1@1350.9,1621.19
NetLB7_2: LB7.2 USB5.1
NetLED1_1: LED1.1 R4.2 | length 292.9
  Top Layer w15: LED1.1@1499.17,1979.83 ccw(c1485.09,1993.91) 1505,1993.91 ccw(c1524.91,1993.91) LED1.1@1510.83,1979.83 ; LED1.1 1505,1999 1524,2018 1613,2018 1635,1996 ; 1627.3,2003.7 cw(c1597.15,1973.56) R4.2@1639.78,1973.49 ; R4.2@1628.28,1981.19 ccw(c1615.33,1996) 1635,1996 ; R4.2 1635,1996 ; R4.2@1641.72,1981.19 cw(c1654.67,1996) 1635,1996
NetQ1_1: Q1.1 R10.2 | length 379.6
  Top Layer w10: Q1.1@1354.38,1792.48 ccw(c1340.61,1809.5) 1362.5,1809.5 ; Q1.1 1362.5,1809.5 ; Q1.1@1370.62,1792.48 cw(c1384.39,1809.5) 1362.5,1809.5 ; R10.2@1576.04,1829.42 ccw(c1562.74,1846) 1584,1846 ; R10.2 1584,1846 ; R10.2@1591.96,1829.42 cw(c1605.26,1846) 1584,1846 ; 1362.5,1809.5 1372,1819 1439.46,1819 1481.46,1861 1569,1861 1584,1846
OVCUR1: R1.2 R7.1 U1.21 | length 497.6
  Top Layer w10: U1.21 1151.8,1546.8 1224.34,1619.34 R7.1 1262,1669.28 1262,1721.5 R1.2 ; 1193.94,1588.94 ccw(c1151.27,1631.62) R7.1@1211.62,1631.62 ; 1211.01,1606.01 ccw(c1185.41,1631.62) R7.1@1221.62,1631.62 ; R1.2@1224,1746.79 cw(c1224,1716.09) 1245.71,1737.8 cw(c1267.42,1759.5) R1.2@1236.72,1759.5 ; R7.1@1224.34,1644.34 ccw(c1224.34,1675.04) 1246.05,1653.33 ccw(c1267.75,1631.62) R7.1@1237.05,1631.62
PGANG: LED1.2 R6.2 U1.18 | length 814.4
  Top Layer w10: U1.18 1228.57,1568.57 1284,1624 1284,1798 1323,1837 1432,1837 1505,1910 LED1.2 1507.51,1911.01 R6.2 ; 1482.58,1887.58 ccw(c1459.15,1911.01) LED1.2@1492.28,1911.01 ; 1489.76,1894.76 cw(c1503.03,1881.5) LED1.2@1503.03,1900.26 ; LED1.2@1506.97,1921.76 ccw(c1506.97,1949.02) 1526.24,1929.74 ; LED1.2@1517.72,1911.01 cw(c1542.35,1911.01) 1524.93,1928.43 ; R6.2@1557.28,1973.5 cw(c1526.58,1973.5) 1548.29,1951.79 cw(c1570,1930.08) R6.2@1570,1960.78
PSELF: JA1.3 R9.2 R10.1 U1.17 | length 2393.2
  Top Layer w10: U1.17 1254.16,1568.7 1302,1616.54 1302,1727 1314,1739 ; v1@1310.18,1784.18 cw(c1298.56,1772.56) 1315,1772.56 cw(c1331.44,1772.56) v1@1319.82,1784.18 ; v1(1315,1789) 1315,1740 1314,1739 ; 1446.04,1739 ccw(c1446.04,1829.46) R9.2@1510.01,1765.5 ; 1470.18,1739 ccw(c1470.18,1805.32) R9.2@1517.08,1758.42 ; 1494.33,1739 ccw(c1494.33,1781.18) R9.2@1524.15,1751.35 ; R9.2@1527.99,1747.51 cw(c1549.7,1725.8) 1549.7,1756.5 cw(c1549.7,1787.2) R9.2@1527.99,1765.5 ; R10.1@1575.01,1747.51 ccw(c1553.3,1725.8) 1553.3,1756.5 ccw(c1553.3,1787.2) R10.1@1575.01,1765.5 ; R10.1 R9.2 1501.5,1739 1314,1739
  Bottom Layer w10: JA1.3@329.15,2086.42 cw(c270.47,2027.75) 353.45,2027.75 cw(c436.43,2027.75) JA1.3@377.75,2086.42 ; JA1.3@336.22,2093.49 cw(c294.61,2051.89) 353.45,2051.89 cw(c412.28,2051.89) JA1.3@370.68,2093.49 ; JA1.3 353.45,1903.55 386,1871 1258,1871 1315,1814 v1(1315,1789) ; v1@1310.18,1793.82 ccw(c1298.56,1805.44) 1315,1805.44 ccw(c1331.44,1805.44) v1@1319.82,1793.82
PWREN1: U1.22
RESET: C12.2 R2.2 R8.1 U1.13 | length 631.9
  Top Layer w10: U1.13 1279.75,1241.75 1292,1254 1386.5,1254 R8.1 C12.2 R2.2 ; 1336,1254 cw(c1336,1175.5) R8.1@1391.51,1231.01 ; 1360.15,1254 cw(c1360.15,1199.64) R8.1@1398.58,1238.08 ; R8.1@1384.29,1254 cw(c1384.29,1223.78) R8.1@1405.65,1245.15 ; R2.2@1391.47,1361.01 cw(c1369.76,1339.3) 1400.46,1339.3 cw(c1431.16,1339.3) R2.2@1409.45,1361.01 ; R8.1@1391.51,1248.99 ccw(c1369.91,1270.59) 1400.46,1270.59 ; C12.2@1391.51,1296.01 cw(c1369.91,1274.41) 1400.46,1274.41 ; C12.2@1391.51,1313.99 ccw(c1369.91,1335.59) 1400.46,1335.59 ; 1400.46,1270.81 ccw(c1431.31,1270.81) R8.1@1409.5,1248.99 ; 1400.46,1274.19 cw(c1431.31,1274.19) C12.2@1409.5,1296.01 ; 1400.46,1335.81 ccw(c1431.31,1335.81) C12.2@1409.5,1313.99
  Top Layer w15: R8.1 R8.1
RREF: R5.1 U1.4 | length 228.9
  Top Layer w10: R5.1@954.68,1065.89 ccw(c944.75,1080) 962,1080 ; R5.1 962,1080 ; R5.1@969.32,1065.89 cw(c979.25,1080) 962,1080 ; U1.4 1049.43,1128.65 1007.79,1087 969,1087 962,1080
USBVCC: LB7.1 Q1.3 R2.1 | length 996
  Top Layer w10: LB7.1 1453.37,1956.63 v2(1455,1955) ; LB7.1@1421.71,1944.85 cw(c1450.14,1916.42) 1450.14,1956.63 cw(c1450.14,1996.84) LB7.1@1421.71,1968.41 ; LB7.1@1429.87,1956.63 cw(c1429.87,1929.87) v2@1448.79,1948.79 ; 1437.74,1956.63 ccw(c1437.74,1972.26) v2@1448.79,1961.21 ; R2.1 v2(1520,1370) ; R2.1@1472.44,1361.01 cw(c1494.15,1339.3) 1494.15,1370 cw(c1494.15,1400.7) R2.1@1472.44,1378.99 ; v2@1513.79,1363.79 ccw(c1498.8,1348.8) 1498.8,1370 ccw(c1498.8,1391.2) v2@1513.79,1376.21
  Bottom Layer w10: v2(1455,1955) 1520,1890 v2(1520,1370) ; v2@1513.79,1376.21 ccw(c1498.8,1391.2) 1520,1391.2 ccw(c1541.2,1391.2) v2@1526.21,1376.21 ; 1469.99,1940.01 cw(c1484.98,1955) 1463.78,1955 ccw(c1484.98,1955) 1469.99,1940.01 ; 1469.99,1940.01 ccw(c1455,1925.02) 1455,1946.22 cw(c1455,1925.02) 1469.99,1940.01
USBVDD: EC2.1 EC3.1 EC4.1 EC5.1 FU1.1 LB3.1 LB4.1 LB5.1 LB6.1 R1.1 | length 4455.5
  Top Layer w15: R1.1 1263.5,1822.5 v2(1264,1822) ; R1.1@1231.22,1815.27 cw(c1248.66,1797.83) 1248.66,1822.5 cw(c1248.66,1847.16) R1.1@1231.22,1829.72 ; 1247.64,1822.5 cw(c1247.64,1805.64) v2@1259.56,1817.56 ; 1250.04,1822.5 ccw(c1250.04,1835.96) v2@1259.56,1826.44
  Top Layer w40: LB4.1@488.18,706.23 EC3.1 ; EC2.1@681.94,1789.88 EC2.1 707.85,1763.97 LB3.1 ; EC2.1@686.69,1753.12 cw(c635.6,1702.03) 707.85,1702.03 ; EC4.1 1130.82,500.18 1176.7,454.3 LB5.1 ; LB6.1 1555.6,1037.4 1657.82,935.18 EC5.1 ; 1633.65,959.35 cw(c1603.04,928.75) EC5.1@1646.32,928.75
  Top Layer w50: FU1.1 EC2.1@681.94,1789.88
  Bottom Layer w15: EC2.1 763.82,1846 1240,1846 v2(1264,1822) ; EC2.1@694.82,1801.74 ccw(c694.82,1861.48) 737.06,1819.24 ; EC2.1@694.82,1816.74 ccw(c694.82,1912.69) 762.67,1844.85 ; EC2.1@718.81,1792.75 cw(c738.73,1792.75) 724.65,1806.83 ; v2@1257.72,1822 ccw(c1242.56,1822) 1253.28,1832.72 ccw(c1264,1843.44) v2@1264,1828.28
  Bottom Layer w50: EC3.1 693.82,884 694.82,885 ; EC2.1 694.82,885 ; EC5.1 1657.82,836.82 1321.18,500.18 EC4.1 906.82,500.18 694.82,712.18 694.82,885
VCC: C14.2 EC6.1 FU1.2 JA1.1 Q1.2 R9.1 U1.23 | length 2313.8
  Top Layer w10: Q1.2 1451.44,1782.44 v2(1476.16,1807.16) ; Q1.2@1437.76,1785.32 ccw(c1442.2,1813.37) 1462.29,1793.29 ; Q1.2@1439.32,1795.19 ccw(c1446,1837.33) v2(1476.16,1807.16) ; v2@1467.38,1807.16 cw(c1446.19,1807.16) 1461.18,1792.18 cw(c1476.16,1777.19) v2@1476.16,1798.38 ; v2@1467.56,1782.44 v2(1476,1774) ; v2@1475.2,1807.91 cw(c1498.71,1789.85) 1498.71,1819.5 ; v2@1483.13,1801.82 cw(c1519,1774.27) R9.1 1488.5,1819.5 ; R9.1@1509.97,1810.55 ccw(c1488.5,1789.27) 1488.5,1819.5 ; R9.1@1509.97,1828.45 cw(c1488.5,1849.72) 1488.5,1819.5 ; v2(1476.16,1807.16) 1488.5,1819.5
  Top Layer w15: U1.23 1100.61,1572.72 1131.95,1604.05 C14.2 ccw(c1191.04,1599.66) v2@1146.26,1596.45 ; 1101.79,1573.89 cw(c1140,1535.68) v2@1140,1589.72 ; C14.2@1149.08,1631.4 cw(c1124.42,1631.4) 1141.86,1613.96 cw(c1159.3,1596.52) C14.2@1159.3,1621.19 ; Q1.2@1440.46,1782.44 cw(c1440.46,1738.46) v2@1471.56,1769.56 ; Q1.2@1444.66,1775.08 cw(c1462.44,1757.3) 1462.44,1782.44 cw(c1462.44,1807.58) Q1.2@1444.66,1789.8 ; Q1.2@1451.44,1782.44 v2@1467.56,1782.44
  Top Layer w20: v2(1476,1774) 1476.16,1774.16 v2(1476.16,1807.16)
  Top Layer w50: JA1.1 536.39,2033.82 EC6.1
  Bottom Layer w15: v2(1140,1596) 1193,1649 1395,1649 1476.16,1730.16 v2@1476.16,1773.84 ; v2@1140,1602.28 ccw(c1140,1617.44) 1150.72,1606.72 ccw(c1161.44,1596) v2@1146.28,1596 ; v2@1471.56,1769.56 cw(c1460.44,1758.44) 1476.16,1758.44 ; 1476.16,1759.24 cw(c1490.76,1759.24) v2@1480.44,1769.56
  Bottom Layer w50: EC6.1 1305.18,2033.82 1476,1863 1476,1807.16 v2(1476,1774)
X1: R3.1 U1.6 | length 217.3
  Top Layer w10: R3.1@1082.91,1063.69 ccw(c1040.16,1106.43) 1100.61,1106.43 ; R3.1@1089.98,1056.62 ccw(c1064.3,1082.29) 1100.61,1082.29 ; R3.1 1100.61,1063.41 U1.6
X2: C11.2 U1.7 Y1.2 | length 926.9
  Top Layer w10: U1.7 1126.2,957.4 C11.2 1135,903.8 1135,804 1152,787 Y1.2 ; C11.2@1157.4,913.48 ccw(c1157.4,882.78) 1135.7,904.49 ccw(c1113.99,926.2) 1144.69,926.2 ccw(c1113.99,926.2) 1135.7,947.91 ccw(c1157.4,969.62) C11.2@1157.4,938.92 ; Y1.2@1237.74,762.7 ccw(c1179.07,704.02) 1179.07,787 ccw(c1179.07,869.98) Y1.2@1237.74,811.3 ; Y1.2@1244.82,769.77 ccw(c1203.21,728.17) 1203.21,787 ccw(c1203.21,845.83) Y1.2@1244.82,804.23
pads on no net: M1.1 M2.1 M3.1 M4.1 U1.14 U1.19 U1.20 USB5.4 USB5.MH1 USB5.MH2

## Polygon pours and split planes (outlines as drawn)
GND on Top Layer "Top Layer-No Net" (hatched 90Degree grid 5 track 5, remove dead copper, pour order 1000): 0,2500 2250,2500 2250,0 0,0 0,2500
GND on Bottom Layer "Top Layer-No Net" (hatched 90Degree grid 5 track 5, remove dead copper, pour order 1001): 0,2500 2250,2500 2250,0 0,0 0,2500

## Keep-outs
Keep-Out Layer:
  lines w7.87: -0.23,2379.02 cw(c131,2369) 118.99,2500.06 ; -0.15,119.99 ccw(c131,131) 118.99,-0.06 ; 2130,2500 cw(c2118.99,2368.85) 2250.12,2380.01 ; 2131.01,-0.06 ccw(c2119,131) 2250.15,119.99 ; 0,0 0,2500 2250,2500 2250,0 0,0

## Other copper
Top Layer:
  rectangle net GND: 1300,1492 1330,1550
  rectangle net VCC: 1429,1766 1486,1799
  rectangle net USBVCC: 1382,1864 1418,1974
  rectangle net NetLB7_2: 1382,2020 1420,2211
  rectangle net VCC: 469,1864 597,2058

## Text inside footprints (layer, text, board x,y; h text height)
USB1: Top Overlay "DM" at 456.05,1440.13 h28 r180; Top Overlay "GND" at 456.05,1262.97 h28 r180; Top Overlay "DP" at 456.05,1361.39 h28 r180; Top Overlay "+5V" at 459.98,1538.56 h28 r180
USB2: Top Overlay "DM" at 521.87,455.05 h28 r270; Top Overlay "GND" at 699.03,455.05 h28 r270; Top Overlay "DP" at 600.61,455.05 h28 r270; Top Overlay "+5V" at 423.44,458.98 h28 r270
USB3: Top Overlay "DM" at 1616.87,456.05 h28 r270; Top Overlay "GND" at 1794.03,456.05 h28 r270; Top Overlay "DP" at 1695.61,456.05 h28 r270; Top Overlay "+5V" at 1518.44,459.98 h28 r270
USB4: Top Overlay "DM" at 1794.95,1331.87 h28; Top Overlay "GND" at 1794.95,1509.03 h28; Top Overlay "DP" at 1794.95,1410.61 h28; Top Overlay "+5V" at 1791.02,1233.44 h28